# EAGLE board power electronics5 (EAGLE 9.2.2)
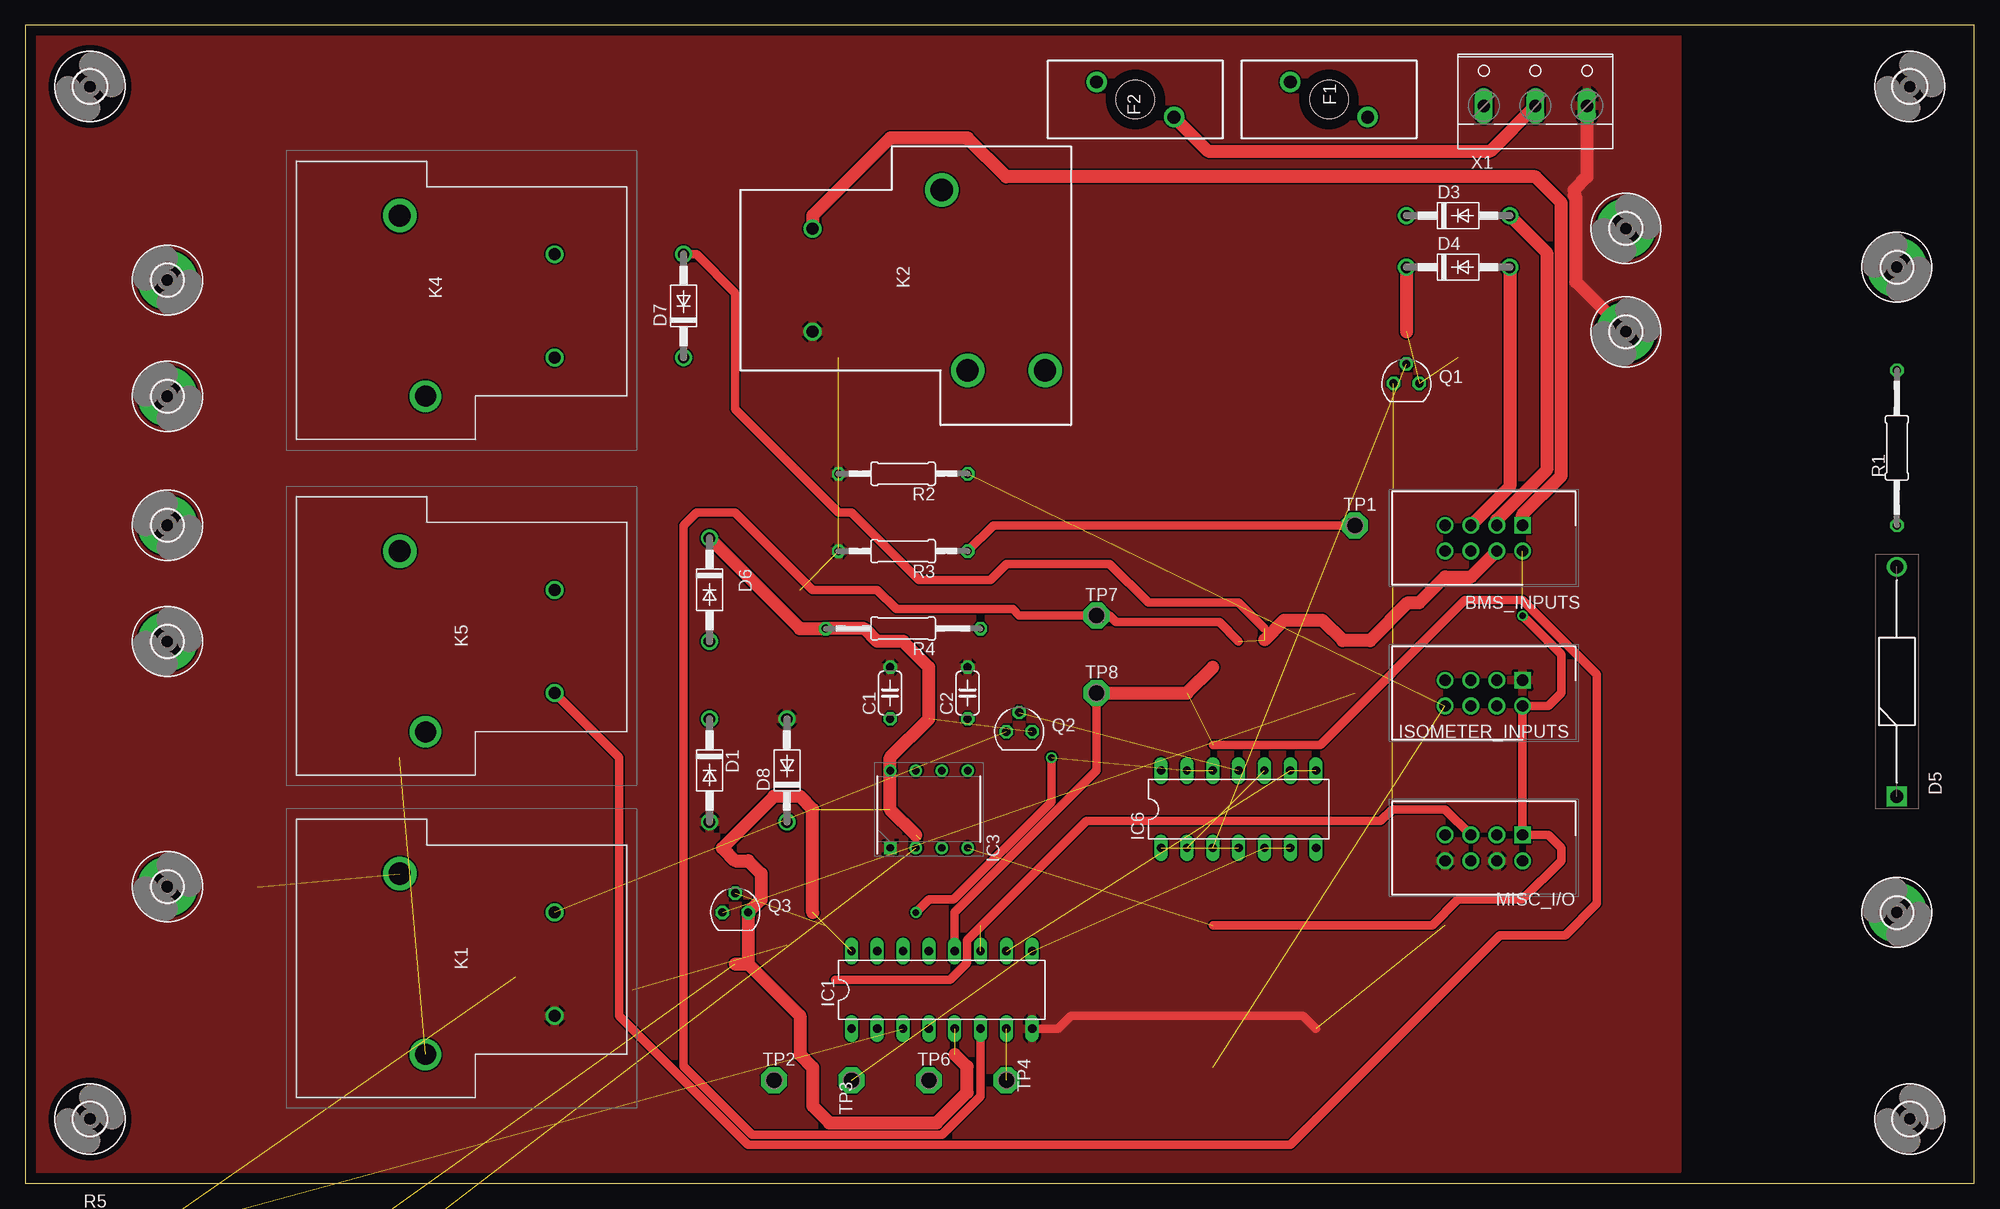
[diagram p0: board, top side]
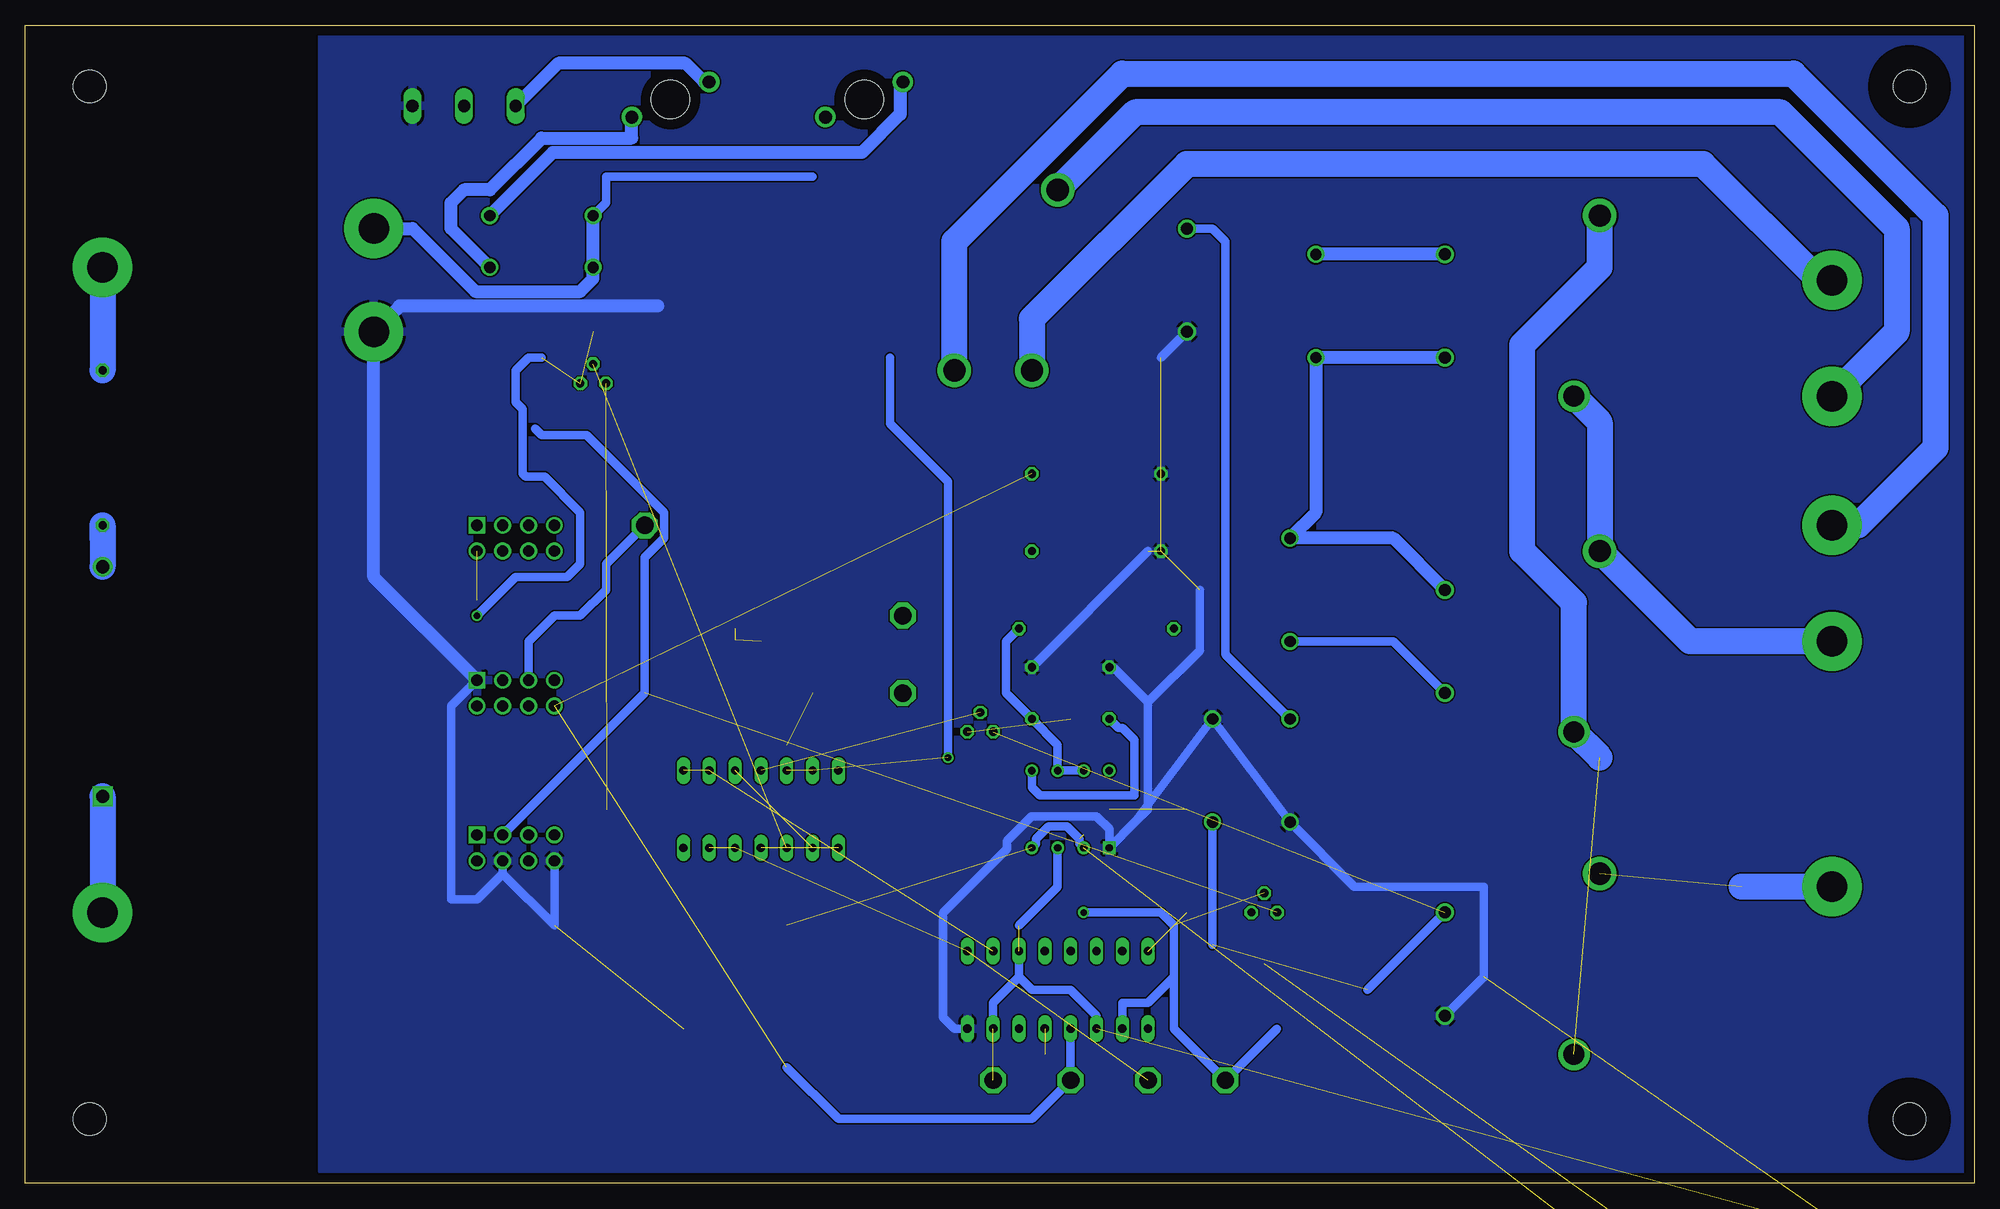
[diagram p1: board, bottom side, seen from below]

Size 191.75 x 113.97 mm. Coordinates in mm from the lower left corner, seen from the top.
Outline: 0,0 191.75,0 191.75,113.97 0,113.97 0,0
Copper layers (1*16): Top 0.035mm / dielectric 1.5mm / Bottom 0.035mm
Design rules "default": minimum track width 6mil, minimum drill 0.35mm, track to track 6mil, track to pad 6mil, pad to pad 6mil, via to via 6mil, smd to smd 6mil, copper to edge 40mil, drill to drill 6mil, minimum pad ring 10mil, minimum via ring 8mil, stop-mask expansion 4mil, vias tented up to drill 0mil, thermal gap 10mil

## Footprints (pad centres in the part's own frame; a part is rotated, then mirrored left to right if it is on the bottom)
HDRV8W64P254_2X4_1778X895X915P = drill 1.1 pad 1.65 square: 1 0,0 | drill 1.1 pad 1.65: 2 0,2.54; 3 2.54,0; 4 2.54,2.54; 5 5.08,0; 6 5.08,2.54; 7 7.62,0; 8 7.62,2.54
C050-024X044 = drill 0.813 octagon: 1 -2.54,0; 2 2.54,0
DO41-10 = drill 1.118: A 5.08,0; C -5.08,0
DIOAD2260W109L864D349 = drill 1.3 pad 1.95 square: 1 0,0 | drill 1.3 pad 1.95: 2 22.6,0
3,0-PAD = drill 3 pad 5.842: B3,0 0,0
01530008 = drill 1.27 pad 2: 1 1.727,3.81; 2 -1.727,-3.81 | hole 3.785: 0,0
3,2 = hole 3.2: 0,0
DIL16 = drill 0.813 long: 1 -8.89,-3.81; 2 -6.35,-3.81; 3 -3.81,-3.81; 4 -1.27,-3.81; 5 1.27,-3.81; 6 3.81,-3.81; 7 6.35,-3.81; 8 8.89,-3.81; 9 8.89,3.81; 10 6.35,3.81; 11 3.81,3.81; 12 1.27,3.81; 13 -1.27,3.81; 14 -3.81,3.81; 15 -6.35,3.81; 16 -8.89,3.81
DIP762W53P254L980H533Q8N = drill 0.73 pad 1.13 square: 1 -3.81,3.81 | drill 0.73 pad 1.13: 2 -3.81,1.27; 3 -3.81,-1.27; 4 -3.81,-3.81; 5 3.81,-3.81; 6 3.81,-1.27; 7 3.81,1.27; 8 3.81,3.81
DIL14 = drill 0.813 long: 1 -7.62,-3.81; 2 -5.08,-3.81; 3 -2.54,-3.81; 4 0,-3.81; 5 2.54,-3.81; 6 5.08,-3.81; 7 7.62,-3.81; 8 7.62,3.81; 9 5.08,3.81; 10 2.54,3.81; 11 0,3.81; 12 -2.54,3.81; 13 -5.08,3.81; 14 -7.62,3.81
T9AS1D1248T9A = drill 1.17 pad 1.755: 1 0,0; 2 -10.16,0 | drill 2.06 pad 3.09: 3 -13.97,12.7 | drill 2.19 pad 3.3: 4 3.81,15.24
T9AS1D12 = drill 2.19 pad 3.29: 1 -8.89,12.7; 2 8.89,15.24; 3 8.89,22.86 | drill 1.17 pad 1.77: 4 -5.08,0; 5 5.08,0
SOT54E = drill 0.813 octagon: D -1.27,0; G 0,1.905; S 1.27,0
0207/15 = drill 0.813 octagon: 1 -7.62,0; 2 7.62,0
0207/12 = drill 0.813 octagon: 1 -6.35,0; 2 6.35,0
P1-17 = drill 1.702 pad 2.54 octagon: TP 0,0
W237-3E = drill 1.194 long: 1 -5.08,-0.635; 2 0,-0.635; 3 5.08,-0.635

## Placement (x,y rotation side)
BMS_INPUTS  T821108A1S100CEU  [HDRV8W64P254_2X4_1778X895X915P]  147.32,64.77 180 top
C1  0.1uF  [C050-024X044]  85.09,48.26 90 top
C2  220uF  [C050-024X044]  92.71,48.26 90 top
C3  50uF  [C050-024X044]  3.81,-8.89 0 top  (outside the outline)
D1  1N4004  [DO41-10]  67.31,40.64 270 top
D3  1N4004  [DO41-10]  140.97,95.25 0 top
D4  1N4004  [DO41-10]  140.97,90.17 0 top
D5  1N5369BRLG  [DIOAD2260W109L864D349]  184.15,38.1 90 top
D6  1N4004  [DO41-10]  67.31,58.42 270 top
D7  1N4004  [DO41-10]  64.77,86.36 90 top
D8  1N4004  [DO41-10]  74.93,40.64 90 top
EMSDC  MOUNT-PAD-ROUND3.0  [3,0-PAD]  13.97,29.21 0 top
EMSDC_POSAIR-  MOUNT-PAD-ROUND3.0  [3,0-PAD]  13.97,64.77 270 top
EMSDC_PRECHARGERELAY-  MOUNT-PAD-ROUND3.0  [3,0-PAD]  13.97,88.9 270 top
EMSDC_TSMS+  MOUNT-PAD-ROUND3.0  [3,0-PAD]  13.97,53.34 0 top
EMSDC_TSMS-  MOUNT-PAD-ROUND3.0  [3,0-PAD]  13.97,77.47 270 top
F1  01530008Z  [01530008]  128.27,106.68 270 top
F2  01530008Z  [01530008]  109.22,106.68 90 top
GND  MOUNT-PAD-ROUND3.0  [3,0-PAD]  157.48,83.82 0 top
GND1  MOUNT-PAD-ROUND3.0  [3,0-PAD]  157.48,93.98 0 top
H1  MOUNT-HOLE3.2  [3,2]  185.42,6.35 0 top
H2  MOUNT-HOLE3.2  [3,2]  185.42,107.95 0 top
H3  MOUNT-HOLE3.2  [3,2]  6.35,6.35 0 top
H4  MOUNT-HOLE3.2  [3,2]  6.35,107.95 0 top
HV+  MOUNT-PAD-ROUND3.0  [3,0-PAD]  184.15,26.67 270 top
HV_INDICATOR  MOUNT-PAD-ROUND3.0  [3,0-PAD]  184.15,90.17 90 top
IC1  4043N  [DIL16]  90.17,19.05 0 top
IC3  LM555CN  [DIP762W53P254L980H533Q8N]  88.9,36.83 90 top
IC6  4011N  [DIL14]  119.38,36.83 0 top
ISOMETER_INPUTS  T821108A1S100CEU  [HDRV8W64P254_2X4_1778X895X915P]  147.32,49.53 180 top
K1  T9AS1D12-48=T9A  [T9AS1D1248T9A]  52.07,26.67 90 top
K2  T9AS5D12-12=T9A  [T9AS1D12]  77.47,88.9 270 top
K4  T9AS1D12-48=T9A  [T9AS1D1248T9A]  52.07,91.44 90 top
K5  T9AS1D12-48=T9A  [T9AS1D1248T9A]  52.07,58.42 90 top
MISC_I/O  T821108A1S100CEU  [HDRV8W64P254_2X4_1778X895X915P]  147.32,34.29 180 top
Q1  BS170  [SOT54E]  135.89,78.74 0 top
Q2  BS170  [SOT54E]  97.79,44.45 0 top
Q3  BS170  [SOT54E]  69.85,26.67 0 top
R1  3.3K  [0207/15]  184.15,72.39 270 top
R2  2.2K  [0207/12]  86.36,69.85 180 top
R3  2.2K  [0207/12]  86.36,62.23 180 top
R4  10K  [0207/15]  86.36,54.61 180 top
R5  10K  [0207/15]  8.89,-3.81 0 top  (outside the outline)
R6  50K  [0207/15]  8.89,-16.51 0 top  (outside the outline)
R7  500K  [0207/15]  8.89,-21.59 0 top  (outside the outline)
TP1  TPSPAD1-17  [P1-17]  130.81,64.77 0 top
TP2  TPSPAD1-17  [P1-17]  73.66,10.16 0 top
TP3  TPSPAD1-17  [P1-17]  81.28,10.16 270 top
TP4  TPSPAD1-17  [P1-17]  96.52,10.16 90 top
TP6  TPSPAD1-17  [P1-17]  88.9,10.16 0 top
TP7  TPSPAD1-17  [P1-17]  105.41,55.88 0 top
TP8  TPSPAD1-17  [P1-17]  105.41,48.26 0 top
X1  [W237-3E]  148.59,106.68 0 top

## Library data of the parts
BMS_INPUTS ISOMETER_INPUTS MISC_I/O = SamacSys_Parts; DESCRIPTION: HEADER, VERTICAL, 2.54MM, 8WAY Amphenol T821 Series, 2.54mm Pitch 8 Way 2 Row Straight PCB Header, Solder Termination, 3A; HEIGHT: 9.15mm; MANUFACTURER_NAME: Amphenol; MANUFACTURER_PART_NUMBER: T821108A1S100CEU; RS_PART_NUMBER: 8323569; RS_PRICE-STOCK: http://uk.rs-online.com/web/p/products/8323569
C1-C3 = rcl; SPICEPREFIX: C
D1 D3 D4 D6-D8 = diode
D5 = SamacSys_Parts; ALLIED_NUMBER: 70339233; DESCRIPTION: Zener Diode, 51V 5% 5 W Through Hole 2-pin DO-15; HEIGHT: mm; MANUFACTURER_NAME: ON Semiconductor; MANUFACTURER_PART_NUMBER: 1N5369BRLG; RS_PART_NUMBER: 6547678P; RS_PRICE-STOCK: http://uk.rs-online.com/web/p/products/6547678P
EMSDC EMSDC_POSAIR- EMSDC_PRECHARGERELAY- EMSDC_TSMS+ EMSDC_TSMS- GND GND1 H1-H4 HV+ HV_INDICATOR = holes
F1 F2 = SamacSys_Parts; ALLIED_NUMBER: 70184304; DESCRIPTION: Mini fuseholder,15A 32V Littelfuse 15A PCB Mount Fuse Holder Automotive Fuse, 32 V; HEIGHT: mm; MANUFACTURER_NAME: LITTELFUSE; MANUFACTURER_PART_NUMBER: 01530008Z; RS_PART_NUMBER: 3607317; RS_PRICE-STOCK: https://uk.rs-online.com/web/p/products/3607317
IC1 IC6 = 40xx
IC3 = SamacSys_Parts; DESCRIPTION: ON Semiconductor LM555CN, Timer, 4.5 16 V, 8-Pin PDIP; HEIGHT: 5.33mm; MANUFACTURER_NAME: ON Semiconductor; MANUFACTURER_PART_NUMBER: LM555CN; MOUSER_PART_NUMBER: 512-LM555CN
K1 K4 K5 = SamacSys_Parts; DESCRIPTION: SPST-NO PCB Mount Non-Latching Relay Through Hole, 48V dc; HEIGHT: 20.4mm; MANUFACTURER_NAME: TE Connectivity; MANUFACTURER_PART_NUMBER: T9AS1D12-48=T9A; RS_PART_NUMBER: 6802534P; RS_PRICE-STOCK: http://uk.rs-online.com/web/p/products/6802534P
K2 = SamacSys_Parts; ALLIED_NUMBER: R1111589; DESCRIPTION: PCB Relay SPDT 30A 12Vdc,thru hole SPDT PCB Mount Non-Latching Relay Through Hole, 12V dc; HEIGHT: mm; MANUFACTURER_NAME: TE Connectivity; MANUFACTURER_PART_NUMBER: T9AS5D12-12=T9A; RS_PART_NUMBER: 6802528; RS_PRICE-STOCK: https://uk.rs-online.com/web/p/products/6802528
Q1-Q3 = transistor-small-signal
R1-R7 = rcl; SPICEPREFIX: R
TP1-TP4 TP6-TP8 = testpad
X1 = con-wago-508; OC_FARNELL: unknown; OC_NEWARK: unknown

## Nets
+12V: D3.C D4.C D6.C D7.C GND1.B3,0 IC1.5 IC1.16 IC3.4 IC3.8 ISOMETER_INPUTS.2 K4.2 K5.1 MISC_I/O.1 Q1.S Q2.S Q3.S R4.2 R6.2
AMS_LED_OUT: MISC_I/O.5 Q1.D
CHG_SAFE: BMS_INPUTS.2 D6.A IC1.12 K5.2 TP8.TP
DISCHARGE_ENABLE: BMS_INPUTS.4 D7.A IC1.6 K4.1 TP7.TP
EMSDC_IMD+: K1.3 K4.4 K5.3
GND: C1.2 C2.2 C3.2 D1.A D8.A GND.B3,0 IC1.8 IC3.1 ISOMETER_INPUTS.1 K1.2 K2.5 MISC_I/O.4 MISC_I/O.8 R2.2 R3.2 R5.1 R7.1 X1.3
IMD_LED_OUT: MISC_I/O.3 Q3.D
N$1: EMSDC_TSMS-.B3,0 K2.1
N$2: EMSDC_POSAIR-.B3,0 K2.3
N$3: EMSDC_PRECHARGERELAY-.B3,0 K2.2
N$4: EMSDC_TSMS+.B3,0 K4.3 K5.4
N$5: D5.1 HV+.B3,0
N$6: BMS_INPUTS.3 D3.A F2.1
N$7: D5.2 R1.2
N$8: BMS_INPUTS.5 D4.A F1.1
N$9: HV_INDICATOR.B3,0 R1.1
N$10: ISOMETER_INPUTS.5 R3.1 TP1.TP
N$11: IC1.3 IC1.7 IC1.11 IC3.3 R5.2 TP4.TP
N$12: IC1.9 IC6.5 IC6.6 TP3.TP
N$13: IC1.10 IC6.8 IC6.9
N$14: IC6.1 IC6.4
N$15: D8.C K1.1 Q2.D
N$16: EMSDC.B3,0 K1.4
N$17: IC1.4 ISOMETER_INPUTS.8 R2.1 TP6.TP
N$18: C2.1 IC3.6 IC3.7 R4.1
N$19: C1.1 IC3.5
N$20: IC6.2 IC6.10
N$21: IC6.3 Q1.G
N$22: C3.1 IC3.2 R6.1 R7.2
N$31: F2.2 X1.2
N$33: F1.2 X1.1
N$35: IC1.2 IC6.12 IC6.13 Q3.G TP2.TP
N$37: IC6.11 Q2.G
PRECHARGE/SS_SELECT: BMS_INPUTS.1 D1.C K2.4
VDD: IC6.14
VSS: IC6.7

## Tracks (layer width: path | path; a pad name or v marks a point on that pad's centre or on a via)
+12V  (via drill 0.65)  (9 unrouted)
  Top 0.813: v147.32,55.88 151.13,52.07 151.13,48.26 149.86,46.99 ISOMETER_INPUTS.2 MISC_I/O.1 149.86,34.29 151.13,33.02 151.13,31.75 147.32,27.94 140.97,27.94 138.43,25.4 116.84,25.4
  Top 1.27: D4.C 135.89,83.82 | 77.47,26.67 77.47,36.83 76.2,38.1 73.66,38.1 68.58,33.02 69.85,31.75 71.12,31.75 72.39,30.48 72.39,27.94 Q3.S 71.12,21.59 | 87.63,34.29 85.09,36.83 IC3.8 85.09,41.91 88.9,45.72 88.9,50.8 86.36,53.34 83.82,53.34 82.55,54.61 R4.2 76.2,54.61 D6.C | 69.85,21.59 71.12,21.59 | 71.12,21.59 76.2,16.51 76.2,12.7 77.47,11.43 77.47,7.62 79.12,5.97 89.68,5.97 92.65,8.95 92.65,11.49 91.44,12.7
  Bottom 0.813: 88.03,33.42 88.03,33.91 89.28,35.16 91.06,35.16 92.31,33.91 92.31,33.42 IC3.4 | 114.3,99.06 134.62,99.06 134.62,96.52 D3.C | 140.97,81.28 142.24,81.28 143.51,80.01 143.51,76.89 142.82,76.2 142.82,69.85 142.53,69.56 140.68,69.56 137.16,66.04 137.16,60.96 138.43,59.69 143.51,59.69 v147.32,55.88
  Bottom 1.27: K5.1 57.15,63.5 D6.C 64.77,66.04 D7.C K4.2 | GND1.B3,0 153.67,93.98 147.47,87.78 137.16,87.78 135.89,89.05 D4.C D3.C
AMS_LED_OUT  (1 unrouted)
  Top 0.813: 79.68,20.02 90.98,20.02 92.66,21.7 92.66,23.92 104.41,35.67 133.35,35.67 134.51,36.83 139.7,36.83 MISC_I/O.5
CHG_SAFE  (2 unrouted)
  Top 0.813: K5.2 58.42,41.91 58.42,16.51 71.12,3.81 124.46,3.81 145.09,24.43 151.53,24.43 154.63,27.54 154.63,50.1 147.32,57.42 141.66,57.42 127.42,43.18 116.84,43.18 | IC1.12 91.44,26.67 105.41,40.64 TP8.TP
  Top 1.27: TP8.TP 114.3,48.26 116.84,50.8
  Bottom 0.813: K5.2 57.15,53.34 D6.A
DISCHARGE_ENABLE  (2 unrouted)
  Top 0.813: D7.A 66.04,91.44 69.85,87.63 69.85,76.2 80.01,66.04 81.28,66.04 87.94,59.38 94.94,59.38 96.52,60.96 106.68,60.96 110.49,57.15 119.38,57.15 121.92,54.61 | IC1.6 93.98,8.59 90.17,4.78 71.52,4.78 64.77,11.53 64.77,64.77 66.04,66.04 69.85,66.04 77.47,58.42 83.82,58.42 85.72,56.52 97.16,56.52 97.79,55.88 TP7.TP 106.68,55.88 107.31,55.24 117.47,55.24 119.38,53.34
  Top 1.27: BMS_INPUTS.4 142.24,59.69 139.7,59.69 137.16,57.15 136.06,57.15 132.33,53.42 129.62,53.42 127.6,55.45 123.86,55.45 121.92,53.51
  Bottom 1.27: K4.1 D7.A
EMSDC_IMD+  (1 unrouted)
  Bottom 2.54: 36.83,41.91 K5.3 39.37,57.15 44.45,62.23 44.45,82.55 36.83,90.17 K4.4
GND  (8 unrouted)
  Top 0.813: IC1.8 101.6,15.24 102.87,16.51 125.73,16.51 127,15.24
  Top 1.27: X1.3 153.67,99.06 152.4,97.79 152.4,97.26 152.55,97.11 152.55,88.75 GND.B3,0
  Bottom 0.813: K1.2 48.26,20.32 48.26,29.21 60.96,29.21 D1.A D8.A 82.55,35.56 | 82.55,35.56 81.28,36.83 81.28,47.39 | 82.55,35.56 IC3.1 85.09,34.88 86.34,36.13 92.73,36.13 95.16,33.7 95.16,32.92 101.44,26.64 101.44,16.36 100.33,15.24 IC1.8 | C1.2 84.69,50.8 81.28,47.39 | MISC_I/O.8 139.7,25.4 144.78,30.48 | 144.78,30.48 MISC_I/O.4 | ISOMETER_INPUTS.1 149.86,46.99 149.86,27.94 147.32,27.94 144.78,30.48 | K2.5 80.01,81.28 | 81.28,47.39 76.2,52.47 76.2,58.42 | C2.2 81.28,62.23
  Bottom 1.27: 129.54,86.36 154.94,86.36 GND.B3,0 157.48,59.69 ISOMETER_INPUTS.1
  pour Bottom: 1.27,113.03 162.56,113.03 162.56,1.27 1.27,1.27
  pour Top: 1.27,1.27 162.56,1.27 162.56,113.03 1.27,113.03
IMD_LED_OUT  (1 unrouted)
  Bottom 0.813: MISC_I/O.3 130.81,48.26 130.81,61.59 128.91,63.5 128.91,66.04 136.53,73.66 140.97,73.66 141.6,74.3
N$1
  Bottom 2.54: EMSDC_TSMS-.B3,0 7.62,83.82 7.62,93.98 19.05,105.41 82.55,105.41 K2.1
N$2
  Bottom 2.54: K2.3 100.33,92.71 83.82,109.22 17.78,109.22 3.81,95.25 3.81,72.39 11.43,64.77 EMSDC_POSAIR-.B3,0
N$3
  Bottom 2.54: EMSDC_PRECHARGERELAY-.B3,0 15.24,88.9 26.67,100.33 77.47,100.33 92.71,85.09 K2.2
N$4
  Bottom 2.54: K4.3 36.83,74.93 K5.4 27.94,53.34 EMSDC_TSMS+.B3,0
N$5
  Bottom 2.54: D5.1 HV+.B3,0
N$6
  Top 1.27: BMS_INPUTS.3 144.78,65.3 149.71,70.23 149.71,91.59 D3.A
  Bottom 1.27: F2.1 105.68,108.14 105.68,105.21 109.44,101.45 139.85,101.45 D3.A
N$7
  Bottom 2.54: 184.15,63.5 R1.2 D5.2
N$8
  Top 1.27: D4.A 146.05,68.58 BMS_INPUTS.5
  Bottom 1.27: D4.A 149.86,93.98 149.86,96.52 148.59,97.79 146.05,97.79 140.97,102.87 132.08,102.87 F1.1
N$9
  Bottom 2.54: HV_INDICATOR.B3,0 R1.1
N$10
  Top 0.813: R3.1 95.25,64.77 TP1.TP
  Bottom 0.813: TP1.TP 134.62,60.96 134.62,58.42 137.16,55.88 139.7,55.88 142.24,53.34 ISOMETER_INPUTS.5
N$11  (3 unrouted)
  Bottom 0.813: IC1.3 86.36,16.51 88.9,19.05 92.71,19.05 93.98,20.32 | IC1.11 93.98,20.32 | IC1.7 96.52,17.78 93.98,20.32 | IC3.3 90.17,29.21 93.98,25.4
N$12  (3 unrouted)
N$13  (2 unrouted)
N$14  (1 unrouted)
N$15  (2 unrouted)
  Bottom 0.813: K1.1 59.69,19.05 | D8.C 74.93,23.5
N$16  (1 unrouted)
  Bottom 2.54: EMSDC.B3,0 22.86,29.21
N$17  (2 unrouted)
  Bottom 0.813: IC1.4 TP6.TP 92.71,6.35 111.76,6.35 116.84,11.43
N$18
  Bottom 0.813: IC3.7 IC3.6 90.17,43.18 C2.1 95.25,48.26 95.25,53.34 R4.1
N$19
  Bottom 0.813: C1.1 84.22,44.85 83.82,44.85 82.64,43.67 82.64,38.19 91.93,38.19 92.71,38.97 IC3.5
N$20  (1 unrouted)
N$21  (1 unrouted)
N$22  (3 unrouted)
N$31
  Top 1.27: F2.2 116.38,101.6 144.15,101.6 X1.2
N$33
  Bottom 1.27: F1.2 124.99,108.41 126.8,110.22 139.33,110.22 X1.1
N$35  (via drill 0.65)  (3 unrouted)
  Top 0.813: v87.63,26.67 88.9,27.94 91.34,27.94 100.97,37.56 v100.97,41.91
  Bottom 0.813: 68.58,15.24 TP2.TP 78.74,15.24 78.74,20.32 | 106.68,81.28 106.68,74.78 100.97,69.06 v100.97,41.91 | v87.63,26.67 80.01,26.67 78.74,25.4 78.74,20.32 | IC1.2 83.82,17.78 81.28,17.78 78.74,20.32
N$37  (1 unrouted)
PRECHARGE/SS_SELECT
  Top 1.27: BMS_INPUTS.1 147.32,65.83 151.13,69.64 151.13,96.52 148.59,99.06 96.52,99.06 92.71,102.87 85.09,102.87 77.47,95.25 K2.4
  Bottom 0.813: D1.C 73.66,52.07 73.66,92.71 74.93,93.98 K2.4